# Altium PCB PCB Gate Logic.PcbDoc
Units mm, origin at the board's own origin, x right, y up, seen from the top; angles counter-clockwise.
Board outline 200 x 150 mm, 2 copper layers (Top Layer, Bottom Layer); 95 components, 86 nets, 188 pads, 0 vias.
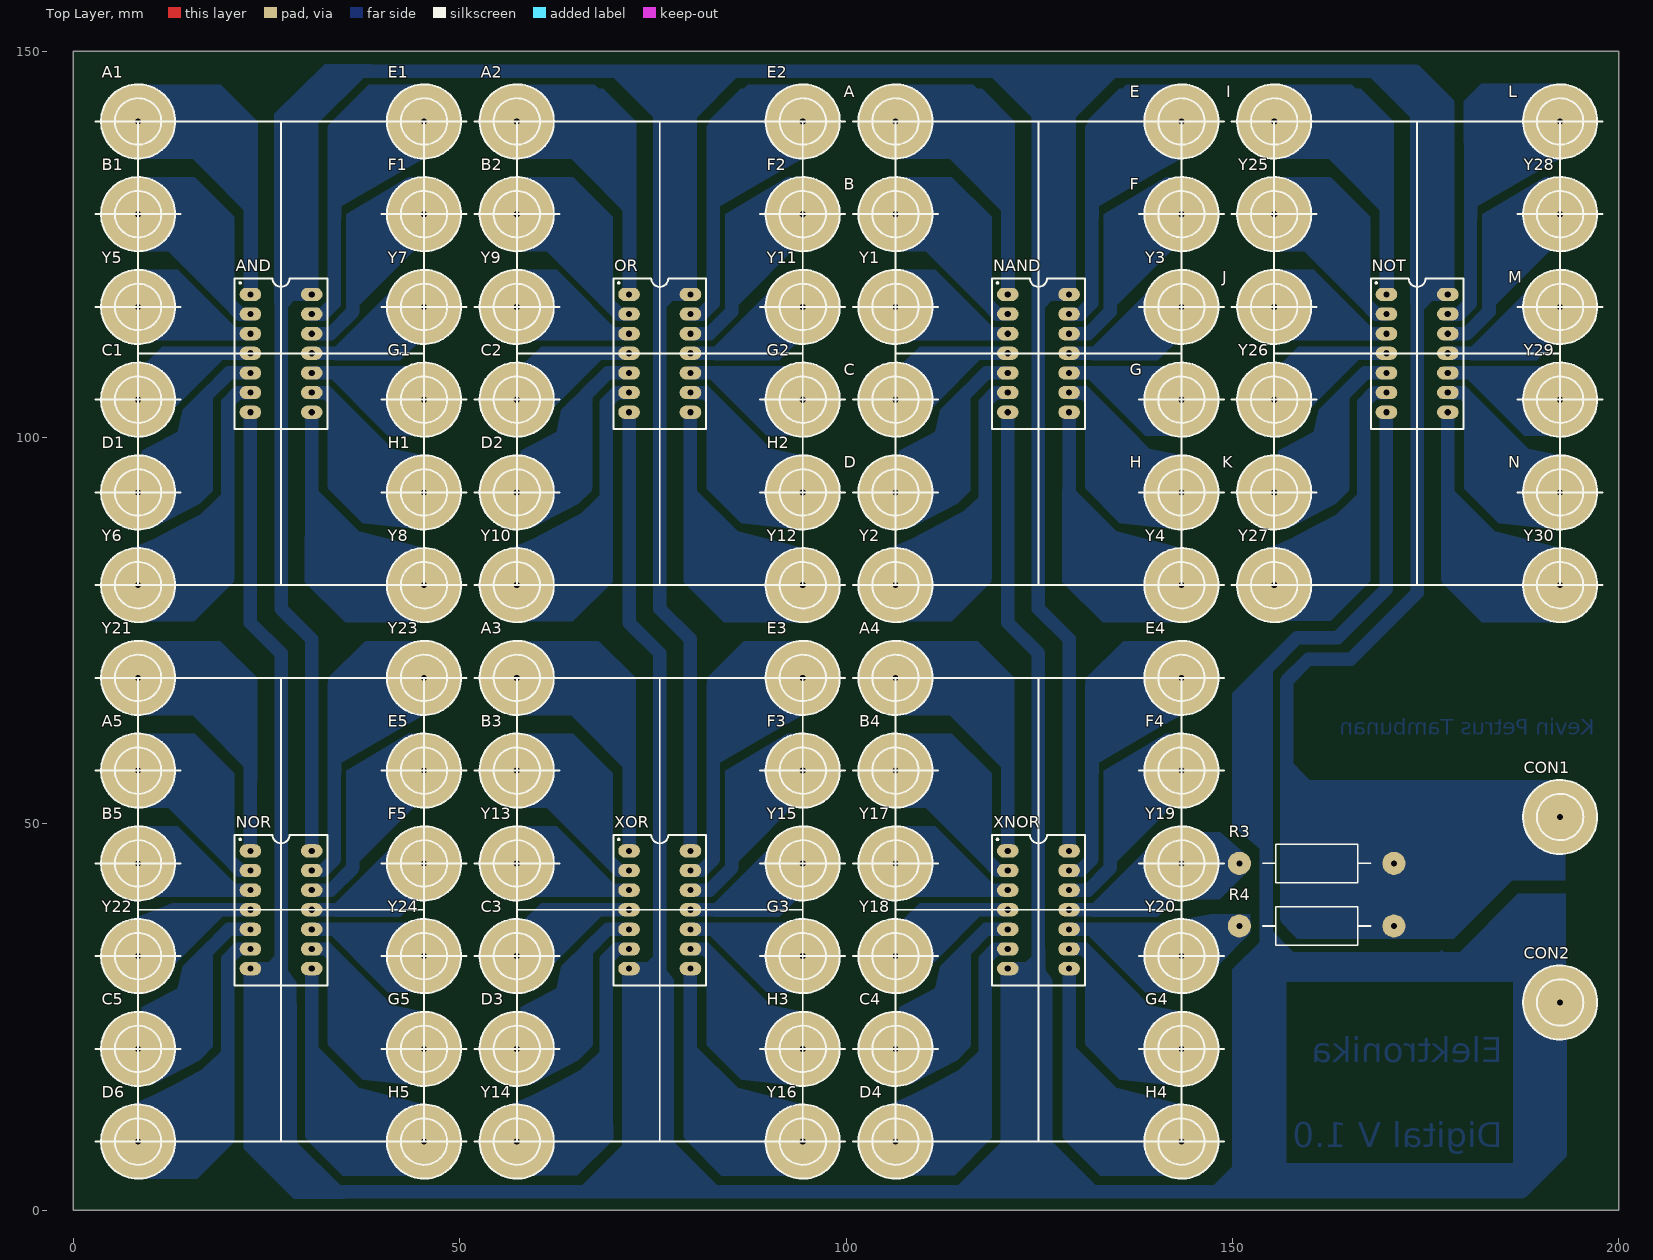
[diagram p0: Top Layer view]
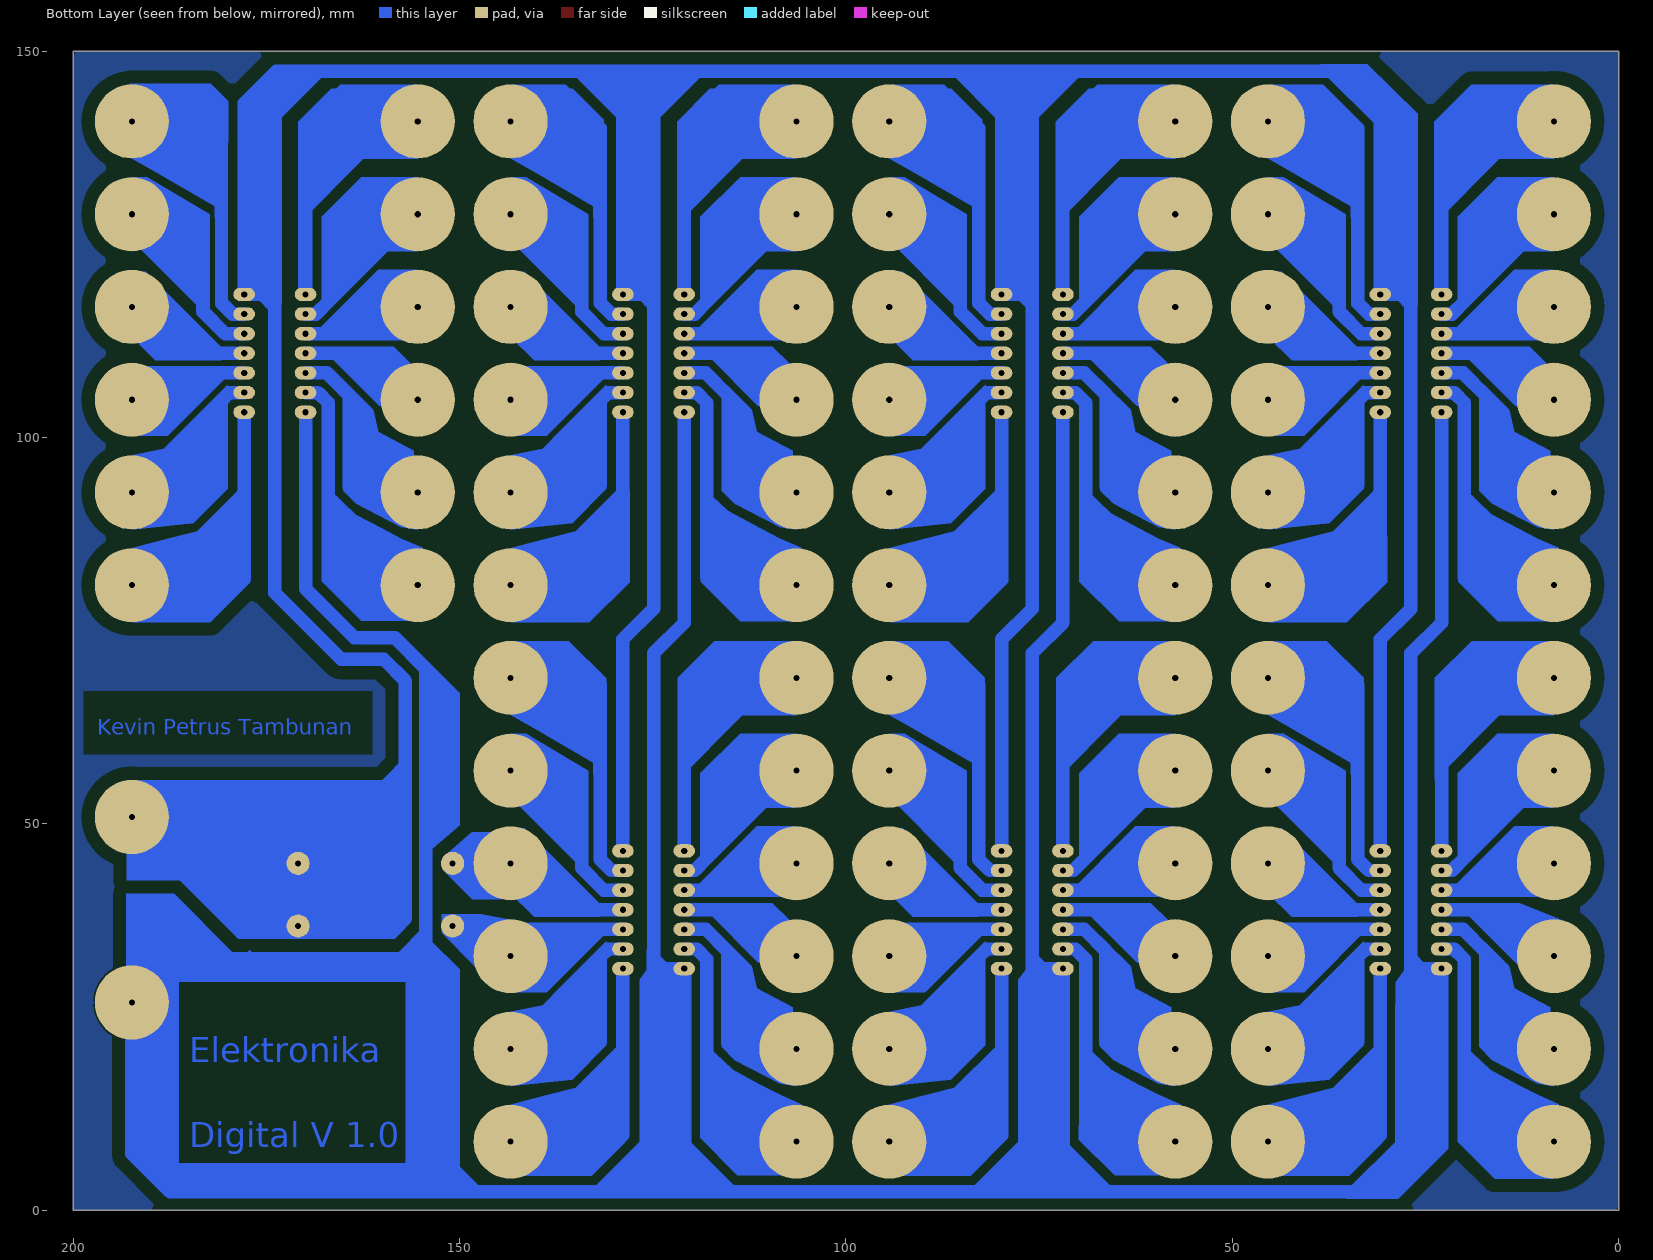
[diagram p1: Bottom Layer view, seen from below]
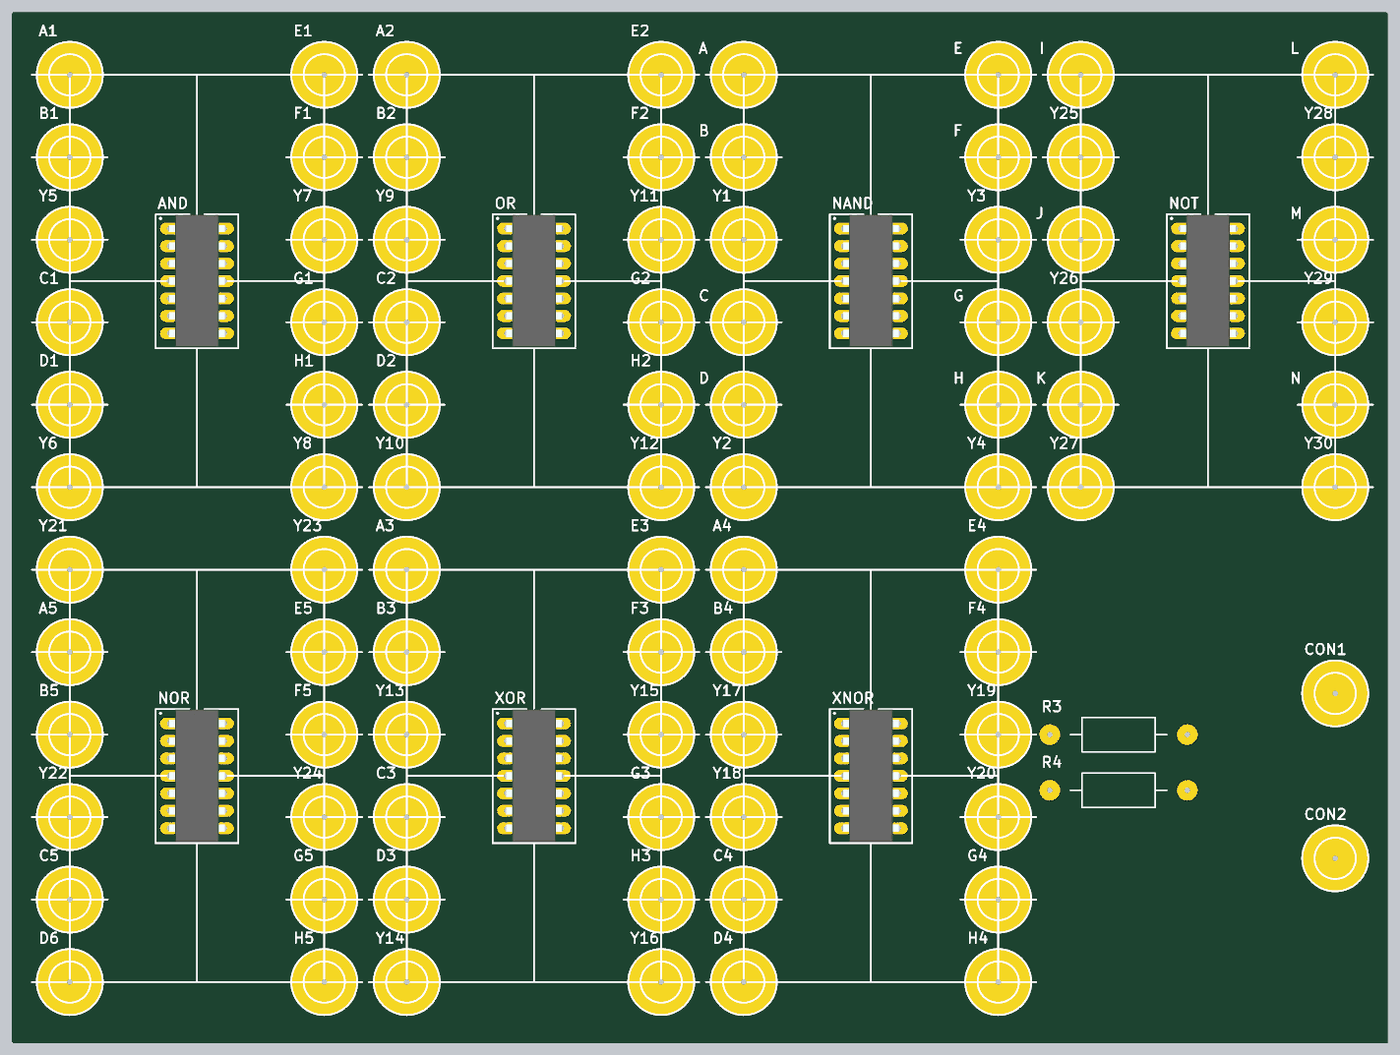
[diagram p2: 3D render of the assembled board from above, using the file's embedded part models]

## Layer stack, top to bottom
Top Solder: solder mask 0.0102, Solder Resist, Dk 3.5
Top Layer: signal copper 0.0356
Dielectric 1: dielectric 0.32, FR-4, Dk 4.8
Bottom Layer: signal copper 0.0356
Bottom Solder: solder mask 0.0102, Solder Resist, Dk 3.5

## Board outline
0,0 200,0 200,150 0,150

## Design rules (kind name [scope] priority, off if disabled: settings)
Clearance [All] p1: gap=1.75 ignorepadtopadclearanceinfootprint=FALSE
PolygonConnect [All] p1: connectstyle=Relief reliefconductorwidth=0.254 reliefentries=4 polygonreliefangle="90 Angle" airgapwidth=0.254
RoutingVias [All] p1: holewidth=0.711 width=1.27 viastyle="Through Hole" minholewidth=0.711 minwidth=1.27 maxholewidth=0.711 maxwidth=1.27
SolderMaskExpansion [All] p1: expansion=0.102
Width [All] p1: maxlimit=0.254 minlimit=0.254 preferedwidth=0.254
30 further rules are at their usual default settings.

## Components (designator, comment, footprint, x,y, rotation, side; value= is the part's Value field where it differs from the comment)
A "Female_Connector_Banana" F_BANANA 106.4,140.9 r90 top locked
A1 "Female_Connector_Banana" F_BANANA 8.4,140.9 r0 top locked
A2 "Female_Connector_Banana" F_BANANA 57.4,140.9 r0 top locked
A3 "Female_Connector_Banana" F_BANANA 57.4,68.9 r0 top locked
A4 "Female_Connector_Banana" F_BANANA 106.4,68.9 r0 top locked
A5 "Female_Connector_Banana" F_BANANA 8.4,56.9 r0 top locked
AND "SN74LS08N" DIP794W53P254L1930H508Q14N 26.9,110.9 r0 top locked
B "Female_Connector_Banana" F_BANANA 106.4,128.9 r90 top locked
B1 "Female_Connector_Banana" F_BANANA 8.4,128.9 r0 top locked
B2 "Female_Connector_Banana" F_BANANA 57.4,128.9 r0 top locked
B3 "Female_Connector_Banana" F_BANANA 57.4,56.9 r0 top locked
B4 "Female_Connector_Banana" F_BANANA 106.4,56.9 r0 top locked
B5 "Female_Connector_Banana" F_BANANA 8.4,44.9 r0 top locked
C "Female_Connector_Banana" F_BANANA 106.4,104.9 r90 top locked
C1 "Female_Connector_Banana" F_BANANA 8.4,104.9 r0 top locked
C2 "Female_Connector_Banana" F_BANANA 57.4,104.9 r0 top locked
C3 "Female_Connector_Banana" F_BANANA 57.4,32.9 r0 top locked
C4 "Female_Connector_Banana" F_BANANA 106.4,20.9 r0 top locked
C5 "Female_Connector_Banana" F_BANANA 8.4,20.9 r0 top locked
CON1 "Female_Connector_Banana" F_BANANA 192.4,50.9 r0 top locked
CON2 "Female_Connector_Banana" F_BANANA 192.4,26.9 r0 top locked
D "Female_Connector_Banana" F_BANANA 106.4,92.9 r90 top locked
D1 "Female_Connector_Banana" F_BANANA 8.4,92.9 r0 top locked
D2 "Female_Connector_Banana" F_BANANA 57.4,92.9 r0 top locked
D3 "Female_Connector_Banana" F_BANANA 57.4,20.9 r0 top locked
D4 "Female_Connector_Banana" F_BANANA 106.4,8.9 r0 top locked
D6 "Female_Connector_Banana" F_BANANA 8.4,8.9 r0 top locked
E "Female_Connector_Banana" F_BANANA 143.4,140.9 r90 top locked
E1 "Female_Connector_Banana" F_BANANA 45.4,140.9 r0 top locked
E2 "Female_Connector_Banana" F_BANANA 94.4,140.9 r0 top locked
E3 "Female_Connector_Banana" F_BANANA 94.4,68.9 r0 top locked
E4 "Female_Connector_Banana" F_BANANA 143.4,68.9 r0 top locked
E5 "Female_Connector_Banana" F_BANANA 45.4,56.9 r0 top locked
F "Female_Connector_Banana" F_BANANA 143.4,128.9 r90 top locked
F1 "Female_Connector_Banana" F_BANANA 45.4,128.9 r0 top locked
F2 "Female_Connector_Banana" F_BANANA 94.4,128.9 r0 top locked
F3 "Female_Connector_Banana" F_BANANA 94.4,56.9 r0 top locked
F4 "Female_Connector_Banana" F_BANANA 143.4,56.9 r0 top locked
F5 "Female_Connector_Banana" F_BANANA 45.4,44.9 r0 top locked
G "Female_Connector_Banana" F_BANANA 143.4,104.9 r90 top locked
G1 "Female_Connector_Banana" F_BANANA 45.4,104.9 r0 top locked
G2 "Female_Connector_Banana" F_BANANA 94.4,104.9 r0 top locked
G3 "Female_Connector_Banana" F_BANANA 94.4,32.9 r0 top locked
G4 "Female_Connector_Banana" F_BANANA 143.4,20.9 r0 top locked
G5 "Female_Connector_Banana" F_BANANA 45.4,20.9 r0 top locked
H "Female_Connector_Banana" F_BANANA 143.4,92.9 r90 top locked
H1 "Female_Connector_Banana" F_BANANA 45.4,92.9 r0 top locked
H2 "Female_Connector_Banana" F_BANANA 94.4,92.9 r0 top locked
H3 "Female_Connector_Banana" F_BANANA 94.4,20.9 r0 top locked
H4 "Female_Connector_Banana" F_BANANA 143.4,8.9 r0 top locked
H5 "Female_Connector_Banana" F_BANANA 45.4,8.9 r0 top locked
I "Female_Connector_Banana" F_BANANA 155.4,140.9 r90 top locked
J "Female_Connector_Banana" F_BANANA 155.4,116.9 r90 top locked
K "Female_Connector_Banana" F_BANANA 155.4,92.9 r90 top locked
L "Female_Connector_Banana" F_BANANA 192.4,140.9 r90 top locked
M "Female_Connector_Banana" F_BANANA 192.4,116.9 r90 top locked
N "Female_Connector_Banana" F_BANANA 192.4,92.9 r90 top locked
NAND "SN74LS00N" DIP794W53P254L1930H508Q14N 124.9,110.9 r0 top locked
NOR "SN74LS02N" DIP794W53P254L1930H508Q14N 26.9,38.9 r0 top locked
NOT "SN74LS04N" DIP794W53P254L1930H508Q14N 173.9,110.9 r0 top locked
OR "SN74LS32N" DIP794W53P254L1930H508Q14N 75.9,110.9 r0 top locked
R3 "Resistor" Resistor 160.9,44.9 r180 top locked
R4 "Resistor" Resistor 160.9,36.8 r180 top locked
XNOR "SN74LS266N" DIP794W53P254L1930H508Q14N 124.9,38.9 r0 top locked
XOR "SN74LS86N" DIP794W53P254L1930H508Q14N 75.9,38.9 r0 top locked
Y1 "Female_Connector_Banana" F_BANANA 106.4,116.9 r0 top locked
Y2 "Female_Connector_Banana" F_BANANA 106.4,80.9 r0 top locked
Y3 "Female_Connector_Banana" F_BANANA 143.4,116.9 r0 top locked
Y4 "Female_Connector_Banana" F_BANANA 143.4,80.9 r0 top locked
Y5 "Female_Connector_Banana" F_BANANA 8.4,116.9 r0 top locked
Y6 "Female_Connector_Banana" F_BANANA 8.4,80.9 r0 top locked
Y7 "Female_Connector_Banana" F_BANANA 45.4,116.9 r0 top locked
Y8 "Female_Connector_Banana" F_BANANA 45.4,80.9 r0 top locked
Y9 "Female_Connector_Banana" F_BANANA 57.4,116.9 r0 top locked
Y10 "Female_Connector_Banana" F_BANANA 57.4,80.9 r0 top locked
Y11 "Female_Connector_Banana" F_BANANA 94.4,116.9 r0 top locked
Y12 "Female_Connector_Banana" F_BANANA 94.4,80.9 r0 top locked
Y13 "Female_Connector_Banana" F_BANANA 57.4,44.9 r0 top locked
Y14 "Female_Connector_Banana" F_BANANA 57.4,8.9 r0 top locked
Y15 "Female_Connector_Banana" F_BANANA 94.4,44.9 r0 top locked
Y16 "Female_Connector_Banana" F_BANANA 94.4,8.9 r0 top locked
Y17 "Female_Connector_Banana" F_BANANA 106.4,44.9 r0 top locked
Y18 "Female_Connector_Banana" F_BANANA 106.4,32.9 r0 top locked
Y19 "Female_Connector_Banana" F_BANANA 143.4,44.9 r0 top locked
Y20 "Female_Connector_Banana" F_BANANA 143.4,32.9 r0 top locked
Y21 "Female_Connector_Banana" F_BANANA 8.4,68.9 r0 top locked
Y22 "Female_Connector_Banana" F_BANANA 8.4,32.9 r0 top locked
Y23 "Female_Connector_Banana" F_BANANA 45.4,68.9 r0 top locked
Y24 "Female_Connector_Banana" F_BANANA 45.4,32.9 r0 top locked
Y25 "Female_Connector_Banana" F_BANANA 155.4,128.9 r0 top locked
Y26 "Female_Connector_Banana" F_BANANA 155.4,104.9 r0 top locked
Y27 "Female_Connector_Banana" F_BANANA 155.4,80.9 r0 top locked
Y28 "Female_Connector_Banana" F_BANANA 192.4,128.9 r0 top locked
Y29 "Female_Connector_Banana" F_BANANA 192.4,104.9 r0 top locked
Y30 "Female_Connector_Banana" F_BANANA 192.4,80.9 r0 top locked

## Footprints (in the part's own frame and the unit in brackets; to place one, negate y for a bottom-side part, rotate by r counter-clockwise, add the part's x,y. Pads: shape width x height; smd on the part's side, far side on the other; paste and mask are expansions set on the pad)
DIP794W53P254L1930H508Q14N [mm]
  oval 2.8x1.72 hole 0.8: 1(-3.97,7.62) 2(-3.97,5.08) 3(-3.97,2.54) 4(-3.97,0) 5(-3.97,-2.54) 6(-3.97,-5.08) 7(-3.97,-7.62) 8(3.97,-7.62) 9(3.97,-5.08) 10(3.97,-2.54) 11(3.97,0) 12(3.97,2.54) 13(3.97,5.08) 14(3.97,7.62)
  silkscreen extent -6,-9.8 6,9.7, body extent -4.1,-9.65 4.1,9.65, height 5.08
F_BANANA [mm]
  round 9.6 hole 0.8: 1(0,0)
  silkscreen extent -4.8,-4.8 4.8,4.8
Resistor [mm]
  round 3 hole 0.8: 1(-10,0) 2(10,0)
  silkscreen extent -7,-2.5 7,2.5

## Part data
AND: "Integrated Circuit", Manufacturer_Name="Texas Instruments", Mouser Part Number=595-SN74LS08N, Arrow Part Number=SN74LS08N, Arrow Price/Stock=https://www.arrow.com/en/products/sn74ls08n/texas-instruments, Datasheet Link=http://componentsearchengine.com/Datasheets/3/SN74LS08N.pdf, Height=5.08mm, Manufacturer_Part_Number=SN74LS08N, Mouser Price/Stock=https://www.mouser.co.uk/ProductDetail/Texas-Instruments/SN74LS08N?qs=spW5eSrOWB4y5MjcKVGhlA%3D%3D
NAND: "Integrated Circuit", Manufacturer_Name="Texas Instruments", Mouser Part Number=595-SN74LS00N, Arrow Part Number=SN74LS00N, Arrow Price/Stock=https://www.arrow.com/en/products/sn74ls00n/texas-instruments, Datasheet Link=http://www.ti.com/lit/gpn/sn74ls00, Height=5.08mm, Manufacturer_Part_Number=SN74LS00N, Mouser Price/Stock=https://www.mouser.co.uk/ProductDetail/Texas-Instruments/SN74LS00N?qs=spW5eSrOWB6G5wECF%252BEZFA%3D%3D
NOR: "Integrated Circuit", Manufacturer_Name="Texas Instruments", Mouser Part Number=595-SN74LS02N, Arrow Part Number=SN74LS02N, Arrow Price/Stock=https://www.arrow.com/en/products/sn74ls02n/texas-instruments, Datasheet Link=http://www.ti.com/lit/gpn/sn74ls02, Height=5.08mm, Manufacturer_Part_Number=SN74LS02N, Mouser Price/Stock=https://www.mouser.co.uk/ProductDetail/Texas-Instruments/SN74LS02N?qs=spW5eSrOWB4KM%252BpAgRke5g%3D%3D
NOT: "Integrated Circuit", Manufacturer_Name="Texas Instruments", Mouser Part Number=595-SN74LS04N, Arrow Part Number=SN74LS04N, Arrow Price/Stock=https://www.arrow.com/en/products/sn74ls04n/texas-instruments, Datasheet Link=http://www.ti.com/lit/gpn/sn74ls04, Height=5.08mm, Manufacturer_Part_Number=SN74LS04N, Mouser Price/Stock=https://www.mouser.co.uk/ProductDetail/Texas-Instruments/SN74LS04N?qs=spW5eSrOWB4DgGWIHPxzvg%3D%3D
OR: "Integrated Circuit", Manufacturer_Name="Texas Instruments", Mouser Part Number=595-SN74LS32N, Arrow Part Number=SN74LS32N, Arrow Price/Stock=https://www.arrow.com/en/products/sn74ls32n/texas-instruments, Datasheet Link=http://componentsearchengine.com/Datasheets/3/SN74LS32N.pdf, Height=5.08mm, Manufacturer_Part_Number=SN74LS32N, Mouser Price/Stock=https://www.mouser.co.uk/ProductDetail/Texas-Instruments/SN74LS32N?qs=q2XTDbzbm6DA9Mnew5GiLA%3D%3D
R3 R4: "Fixed Resistance"
XNOR: "Integrated Circuit", Manufacturer_Name="Texas Instruments", Mouser Part Number=595-SN74LS266N, Arrow Part Number=SN74LS266N, Arrow Price/Stock=https://www.arrow.com/en/products/sn74ls266n/texas-instruments, Datasheet Link=http://www.ti.com/lit/gpn/sn74ls266, Manufacturer_Part_Number=SN74LS266N, Mouser Price/Stock=https://www.mouser.co.uk/ProductDetail/Texas-Instruments/SN74LS266N?qs=JD1fk4stihabbJk2g9oIRA%3D%3D
XOR: "Integrated Circuit", Manufacturer_Name="ON Semiconductor", Datasheet Link=https://docs-emea.rs-online.com/webdocs/0029/0900766b800296c4.pdf, Height=4.69mm, Manufacturer_Part_Number=SN74LS86N

## Nets (pads, with @x,y where several pads share a name; then routed paths per layer and width w, separated by ;. In a path a pad name is that pad's centre, name@x,y a point inside that pad or via, vN(x,y) a via of type N, cw(c..) or ccw(c..) an arc to the next point about the centre after c; other vN are vias at no path point)
+5: AND.14 CON1.1 NAND.14 NOR.14 NOT.14 OR.14 R3.1 R4.1 XNOR.14 XOR.14 | length 644.5
  Bottom Layer w0.254: 79.87,147.37 79.9,147.4 ; 157,51 157.1,50.9
  Bottom Layer w1.74: NOR.14 30.87,73.895 26.9,77.865 26.9,117.182 28.238,118.52 AND.14 30.87,141.035 37.235,147.4 79.9,147.4 128.87,147.4 ; XOR.14 79.87,73.895 75.9,77.865 75.9,117.182 77.238,118.52 OR.14 79.87,147.37 ; XNOR.14 128.87,73.895 124.9,77.865 124.9,117.182 126.238,118.52 NAND.14 128.87,147.4 ; 157.1,50.9 CON1.1 ; R4.1 158,36.8 157,37.8 157,44.9 ; R3.1 157,44.9 ; 128.87,147.4 173.731,147.4 177.87,143.261 NOT.14 175.533,118.52 173.9,116.887 173.9,79.9 165.3,71.3 159.8,71.3 157,68.5 157,51 157,44.9
GND: AND.7 CON2.1 NAND.7 NOR.7 NOT.7 OR.7 XNOR.7 XOR.7 | length 614
  Bottom Layer w0.254: 71.9,2.4 71.93,2.43 ; 120.9,2.4 120.93,2.43
  Bottom Layer w1.74: AND.7 22.93,76.043 26.9,72.073 26.9,32.561 25.619,31.28 NOR.7 22.93,28.47 23.857,27.543 27.057,27.543 28.1,26.5 28.1,8.5 34.2,2.4 71.9,2.4 120.9,2.4 154.4,2.4 ; 71.93,2.43 XOR.7 74.619,31.28 75.9,32.561 75.9,72.073 71.93,76.043 OR.7 ; 120.93,2.43 XNOR.7 123.619,31.28 124.9,32.561 124.9,72.073 120.93,76.043 NAND.7 ; NOT.7 169.93,80.43 163.6,74.1 158.4,74.1 154.4,70.1 154.4,64.1 154.4,2.4 ; CON2.1 192.4,7.34 187.46,2.4 154.4,2.4
NetA1_1: A1.1 AND.1 | length 36.4
  Bottom Layer w1.74: A1.1 22.03,140.9 22.93,140 AND.1
NetA2_1: A2.1 OR.1 | length 36.4
  Bottom Layer w1.74: A2.1 71.03,140.9 71.93,140 OR.1
NetA3_1: A3.1 XOR.1 | length 36.4
  Bottom Layer w1.74: A3.1 71.03,68.9 71.93,68 XOR.1
NetA4_1: A4.1 XNOR.1 | length 36.4
  Bottom Layer w1.74: A4.1 120.03,68.9 120.93,68 XNOR.1
NetA5_1: A5.1 NOR.2 | length 26
  Bottom Layer w1.74: A5.1 19.1,56.9 20,56 20,45.56 21.58,43.98 NOR.2
NetA_1: A.1 NAND.1 | length 36.4
  Bottom Layer w1.74: A.1 120.03,140.9 120.93,140 NAND.1
NetAND_2: AND.2 B1.1 | length 26
  Bottom Layer w1.74: B1.1 19.1,128.9 20,128 20,117.56 21.58,115.98 AND.2
NetAND_3: AND.3 Y5.1 | length 16
  Bottom Layer w1.74: Y5.1 17.1,116.9 20.56,113.44 AND.3
NetAND_4: AND.4 C1.1 | length 17
  Bottom Layer w1.74: C1.1 13,104.9 19,110.9 AND.4
NetAND_5: AND.5 D1.1 | length 27.9
  Bottom Layer w1.74: D1.1 16.6,92.9 17.223,93.523 17.223,105.423 20.16,108.36 AND.5
NetAND_6: AND.6 Y6.1 | length 38.1
  Bottom Layer w1.74: Y6.1 19,80.9 20,81.9 20,104.5 21.32,105.82 AND.6
NetAND_8: AND.8 Y8.1 | length 36.4
  Bottom Layer w1.74: AND.8 30.87,81.73 31.7,80.9 Y8.1
NetAND_9: AND.9 H1.1 | length 26.3
  Bottom Layer w1.74: AND.9 32.78,105.82 33.8,104.8 33.8,93.8 34.7,92.9 H1.1
NetAND_10: AND.10 G1.1 | length 16
  Bottom Layer w1.74: AND.10 33.84,108.36 37.3,104.9 G1.1
NetAND_11: AND.11 Y7.1 | length 17
  Bottom Layer w1.74: AND.11 34.3,110.9 40.3,116.9 Y7.1
NetAND_12: AND.12 F1.1 | length 27.8
  Bottom Layer w1.74: AND.12 33.34,113.44 36.2,116.3 36.2,128 37.1,128.9 F1.1
NetAND_13: AND.13 E1.1 | length 38.1
  Bottom Layer w1.74: AND.13 32.38,115.98 33.8,117.4 33.8,140 34.7,140.9 E1.1
NetB2_1: B2.1 OR.2 | length 26
  Bottom Layer w1.74: B2.1 68.1,128.9 69,128 69,117.56 70.58,115.98 OR.2
NetB3_1: B3.1 XOR.2 | length 26
  Bottom Layer w1.74: B3.1 68.1,56.9 69,56 69,45.56 70.58,43.98 XOR.2
NetB4_1: B4.1 XNOR.2 | length 26
  Bottom Layer w1.74: B4.1 117.1,56.9 118,56 118,45.56 119.58,43.98 XNOR.2
NetB5_1: B5.1 NOR.3 | length 16
  Bottom Layer w1.74: B5.1 17.1,44.9 20.56,41.44 NOR.3
NetB_1: B.1 NAND.2 | length 26
  Bottom Layer w1.74: B.1 117.1,128.9 118,128 118,117.56 119.58,115.98 NAND.2
NetC2_1: C2.1 OR.4 | length 17
  Bottom Layer w1.74: C2.1 62,104.9 68,110.9 OR.4
NetC3_1: C3.1 XOR.4 | length 17
  Bottom Layer w1.74: C3.1 62,32.9 68,38.9 XOR.4
NetC4_1: C4.1 XNOR.5 | length 27.9
  Bottom Layer w1.74: C4.1 114.6,20.9 115.3,21.6 115.3,33.5 118.16,36.36 XNOR.5
NetC5_1: C5.1 NOR.5 | length 27.9
  Bottom Layer w1.74: C5.1 16.6,20.9 17.223,21.523 17.223,33.423 20.16,36.36 NOR.5
NetC_1: C.1 NAND.4 | length 17
  Bottom Layer w1.74: C.1 111,104.9 117,110.9 NAND.4
NetD2_1: D2.1 OR.5 | length 27.9
  Bottom Layer w1.74: D2.1 65.6,92.9 66.3,93.6 66.3,105.5 69.16,108.36 OR.5
NetD3_1: D3.1 XOR.5 | length 27.9
  Bottom Layer w1.74: D3.1 65.6,20.9 66.365,21.665 66.365,33.565 69.16,36.36 XOR.5
NetD4_1: D4.1 XNOR.6 | length 38.1
  Bottom Layer w1.74: D4.1 117,8.9 118,9.9 118,32.5 119.32,33.82 XNOR.6
NetD6_1: D6.1 NOR.6 | length 38.1
  Bottom Layer w1.74: D6.1 19,8.9 20,9.9 20,32.5 21.32,33.82 NOR.6
NetD_1: D.1 NAND.5 | length 27.9
  Bottom Layer w1.74: D.1 114.6,92.9 115.223,93.523 115.223,105.423 118.16,108.36 NAND.5
NetE2_1: E2.1 OR.13 | length 38.1
  Bottom Layer w1.74: OR.13 81.38,115.98 82.8,117.4 82.8,140 83.7,140.9 E2.1
NetE3_1: E3.1 XOR.13 | length 38.1
  Bottom Layer w1.74: XOR.13 81.38,43.98 82.8,45.4 82.8,68 83.7,68.9 E3.1
NetE4_1: E4.1 XNOR.13 | length 38.1
  Bottom Layer w1.74: XNOR.13 130.38,43.98 131.8,45.4 131.8,68 132.7,68.9 E4.1
NetE5_1: E5.1 NOR.12 | length 27.8
  Bottom Layer w1.74: NOR.12 33.34,41.44 36.2,44.3 36.2,56 37.1,56.9 E5.1
NetE_1: E.1 NAND.13 | length 38.1
  Bottom Layer w1.74: NAND.13 130.38,115.98 131.8,117.4 131.8,140 132.7,140.9 E.1
NetF2_1: F2.1 OR.12 | length 27.8
  Bottom Layer w1.74: OR.12 82.34,113.44 85.2,116.3 85.2,128 86.1,128.9 F2.1
NetF3_1: F3.1 XOR.12 | length 27.8
  Bottom Layer w1.74: XOR.12 82.34,41.44 85.2,44.3 85.2,56 86.1,56.9 F3.1
NetF4_1: F4.1 XNOR.12 | length 27.8
  Bottom Layer w1.74: XNOR.12 131.34,41.44 134.2,44.3 134.2,56 135.1,56.9 F4.1
NetF5_1: F5.1 NOR.11 | length 17
  Bottom Layer w1.74: NOR.11 34.3,38.9 40.3,44.9 F5.1
NetF_1: F.1 NAND.12 | length 27.8
  Bottom Layer w1.74: NAND.12 131.34,113.44 134.2,116.3 134.2,128 135.1,128.9 F.1
NetG2_1: G2.1 OR.10 | length 16
  Bottom Layer w1.74: OR.10 82.84,108.36 86.3,104.9 G2.1
NetG3_1: G3.1 XOR.10 | length 16
  Bottom Layer w1.74: XOR.10 82.84,36.36 86.3,32.9 G3.1
NetG4_1: G4.1 XNOR.9 | length 26.3
  Bottom Layer w1.74: XNOR.9 130.78,33.82 131.8,32.8 131.8,21.8 132.7,20.9 G4.1
NetG5_1: G5.1 NOR.9 | length 26.3
  Bottom Layer w1.74: NOR.9 32.78,33.82 33.8,32.8 33.8,21.8 34.7,20.9 G5.1
NetG_1: G.1 NAND.10 | length 16
  Bottom Layer w1.74: NAND.10 131.84,108.36 135.3,104.9 G.1
NetH2_1: H2.1 OR.9 | length 26.3
  Bottom Layer w1.74: OR.9 81.78,105.82 82.8,104.8 82.8,93.8 83.7,92.9 H2.1
NetH3_1: H3.1 XOR.9 | length 26.3
  Bottom Layer w1.74: XOR.9 81.78,33.82 82.8,32.8 82.8,21.8 83.7,20.9 H3.1
NetH4_1: H4.1 XNOR.8 | length 36.4
  Bottom Layer w1.74: XNOR.8 128.87,9.73 129.7,8.9 H4.1
NetH5_1: H5.1 NOR.8 | length 36.4
  Bottom Layer w1.74: NOR.8 30.87,9.73 31.7,8.9 H5.1
NetH_1: H.1 NAND.9 | length 26.3
  Bottom Layer w1.74: NAND.9 130.78,105.82 131.8,104.8 131.8,93.8 132.7,92.9 H.1
NetI_1: I.1 NOT.1 | length 36.4
  Bottom Layer w1.74: I.1 169.03,140.9 169.93,140 NOT.1
NetJ_1: J.1 NOT.3 | length 16
  Bottom Layer w1.74: J.1 164.1,116.9 167.56,113.44 NOT.3
NetK_1: K.1 NOT.5 | length 27.9
  Bottom Layer w1.74: K.1 163.6,92.9 164.3,93.6 164.3,105.5 167.16,108.36 NOT.5
NetL_1: L.1 NOT.13 | length 38.1
  Bottom Layer w1.74: NOT.13 179.38,115.98 180.8,117.4 180.8,140 181.7,140.9 L.1
NetM_1: M.1 NOT.11 | length 17
  Bottom Layer w1.74: NOT.11 181.3,110.9 187.3,116.9 M.1
NetN_1: N.1 NOT.9 | length 26.3
  Bottom Layer w1.74: NOT.9 179.78,105.82 180.8,104.8 180.8,93.8 181.7,92.9 N.1
NetNAND_3: NAND.3 Y1.1 | length 16
  Bottom Layer w1.74: Y1.1 115.1,116.9 118.56,113.44 NAND.3
NetNAND_6: NAND.6 Y2.1 | length 38.1
  Bottom Layer w1.74: Y2.1 117,80.9 118,81.9 118,104.5 119.32,105.82 NAND.6
NetNAND_8: NAND.8 Y4.1 | length 36.4
  Bottom Layer w1.74: NAND.8 128.87,81.73 129.7,80.9 Y4.1
NetNAND_11: NAND.11 Y3.1 | length 17
  Bottom Layer w1.74: NAND.11 132.3,110.9 138.3,116.9 Y3.1
NetNOR_1: NOR.1 Y21.1 | length 36.4
  Bottom Layer w1.74: Y21.1 22.03,68.9 22.93,68 NOR.1
NetNOR_4: NOR.4 Y22.1 | length 17
  Bottom Layer w1.74: Y22.1 13,32.9 19,38.9 NOR.4
NetNOR_10: NOR.10 Y24.1 | length 16
  Bottom Layer w1.74: NOR.10 33.84,36.36 37.3,32.9 Y24.1
NetNOR_13: NOR.13 Y23.1 | length 38.1
  Bottom Layer w1.74: NOR.13 32.38,43.98 33.8,45.4 33.8,68 34.7,68.9 Y23.1
NetNOT_2: NOT.2 Y25.1 | length 26
  Bottom Layer w1.74: Y25.1 166.1,128.9 167,128 167,117.56 168.58,115.98 NOT.2
NetNOT_4: NOT.4 Y26.1 | length 17
  Bottom Layer w1.74: Y26.1 160,104.9 166,110.9 NOT.4
NetNOT_6: NOT.6 Y27.1 | length 38.1
  Bottom Layer w1.74: Y27.1 166,80.9 167,81.9 167,104.5 168.32,105.82 NOT.6
NetNOT_8: NOT.8 Y30.1 | length 36.4
  Bottom Layer w1.74: NOT.8 177.87,81.73 178.7,80.9 Y30.1
NetNOT_10: NOT.10 Y29.1 | length 16
  Bottom Layer w1.74: NOT.10 180.84,108.36 184.3,104.9 Y29.1
NetNOT_12: NOT.12 Y28.1 | length 27.8
  Bottom Layer w1.74: NOT.12 180.34,113.44 183.2,116.3 183.2,128 184.1,128.9 Y28.1
NetOR_3: OR.3 Y9.1 | length 16
  Bottom Layer w1.74: Y9.1 66.1,116.9 69.56,113.44 OR.3
NetOR_6: OR.6 Y10.1 | length 38.1
  Bottom Layer w1.74: Y10.1 68,80.9 69,81.9 69,104.5 70.32,105.82 OR.6
NetOR_8: OR.8 Y12.1 | length 36.4
  Bottom Layer w1.74: OR.8 79.87,81.73 80.7,80.9 Y12.1
NetOR_11: OR.11 Y11.1 | length 17
  Bottom Layer w1.74: OR.11 83.3,110.9 89.3,116.9 Y11.1
NetXOR_3: XOR.3 Y13.1 | length 16
  Bottom Layer w1.74: Y13.1 66.1,44.9 69.56,41.44 XOR.3
NetXOR_6: XOR.6 Y14.1 | length 38.1
  Bottom Layer w1.74: Y14.1 68,8.9 69,9.9 69,32.5 70.32,33.82 XOR.6
NetXOR_8: XOR.8 Y16.1 | length 36.4
  Bottom Layer w1.74: XOR.8 79.87,9.73 80.7,8.9 Y16.1
NetXOR_11: XOR.11 Y15.1 | length 17
  Bottom Layer w1.74: XOR.11 83.3,38.9 89.3,44.9 Y15.1
Y1_XNOR: XNOR.3 Y17.1 | length 16
  Bottom Layer w1.74: Y17.1 115.1,44.9 118.56,41.44 XNOR.3
Y2_XNOR: XNOR.4 Y18.1 | length 17
  Bottom Layer w1.74: Y18.1 111,32.9 117,38.9 XNOR.4
Y3_XNOR: R3.2 XNOR.11 Y19.1 | length 24.5
  Bottom Layer w1.74: XNOR.11 132.3,38.9 138.3,44.9 Y19.1
  Bottom Layer w3: Y19.1 R3.2
Y4_XNOR: R4.2 XNOR.10 Y20.1 | length 25.1
  Bottom Layer w1.74: XNOR.10 131.84,36.36 135.3,32.9 Y20.1 Y20.1@143.63,32.9
  Bottom Layer w3: Y20.1@143.63,32.9 147.53,36.8 R4.2

## Polygon pours and split planes (outlines as drawn)
GND on Bottom Layer "Bottom Layer-GND" (solid, pour order 0): 200.002,150 0,150 -0.007,0 199.996,0

## Other copper
Bottom Layer:
  region net GND: 186.35,5.937 186.35,35.25 190.6,39.5 192.437,39.5 192.437,9.404 191.9,8.855 191.9,5.889
  region net GND: 192.05,6.1 156.579,6.1 154.8,4.321 154.8,1.6 187.55,1.6
  region net GND: 149.977,29 149.977,5.667 146.71,2.4 154.4,2.4 157.021,5.021 156.969,5.073 156.969,29
  region net GND: 149.8,29
  region net GND: 193.098,40.948 186.919,40.948 179.388,33.417 157.883,33.417 154.8,36.5 153.9,36.5 153.9,35.1 149.977,31.177 149.977,25.1 156.969,25.1 156.969,29.6 193.103,29.6
  region net NetH_1: 130.989,106.841 134.697,103.133 136.755,101.075 139.268,98.562 143.428,97.689 143.428,88.077 135.444,88.907 130.989,93.362
  region net NetNAND_8: 129.568,93.24 134.96,87.848 138.276,87.011 141.311,86.245 143.469,85.683 143.367,76.1 133.2,76.1 127.997,81.303 128.004,93.237
  region net NetNAND_6: 118.317,93.348 115.323,90.521 111.094,88.284 108.521,86.934 105.773,85.712 107.012,76.2 113.671,76.2 118.8,81.329 118.8,93.348
  region net NetE_1: 132.67,128.421 132.67,129.899 140.362,134.377 143.452,136.106 143.452,145.363 143.158,145.657 136.265,145.657 131.025,140.417 131.025,128.421
  region net NetA_1: 121.792,127.679 113.449,136.087 106.411,136.087 106.411,145.669 116.458,145.673 121.792,140.339
  region net NetB_1: 118.841,115.545 117.038,117.348 110.299,124.087 106.419,124.087 106.419,133.688 113.7,133.69 118.841,128.549
  region net NetD_1: 115.365,106.761 112.178,103.575 111.548,100.751 106.903,98.289 106.43,88.082 108.519,88.37 114.373,91.443 116.073,93.144
  region net NetNAND_3: 120.64,112.59 106.397,112.59 106.393,121.683 111.547,121.683
  region net NetF_1: 133.347,115.438 144.963,127.054 143.468,133.684 141.38,133.684 133.347,128.865
  region net NetG_1: 129.757,109.213 143.4,109.213 143.404,100.235 142.042,100.235 138.735,100.235
  region net NetNAND_11: 131.866,110.013 140.343,110.013 143.427,113.01 143.251,121.427 141.631,121.427 131.866,111.662
  region net NetH2_1: 81.989,106.841 85.697,103.133 87.755,101.075 90.268,98.562 94.428,97.689 94.428,88.077 86.444,88.907 81.989,93.362
  region net NetOR_8: 80.568,93.24 85.96,87.848 89.276,87.011 92.311,86.245 94.469,85.683 94.367,76.1 84.2,76.1 78.997,81.303 79.004,93.237
  region net NetOR_6: 69.069,93.348 65.759,90.223 62.094,88.284 59.521,86.934 56.773,85.712 58.012,76.2 64.671,76.2 69.8,81.329 69.8,93.348
  region net NetE2_1: 83.67,128.421 83.67,129.899 91.362,134.377 94.452,136.106 94.452,145.363 94.158,145.657 87.265,145.657 82.025,140.417 82.025,128.421
  region net NetA2_1: 72.792,127.679 64.449,136.087 57.411,136.087 57.411,145.669 67.458,145.673 72.792,140.339
  region net NetB2_1: 69.841,115.545 68.038,117.348 61.299,124.087 57.419,124.087 57.419,133.688 64.7,133.69 69.841,128.549
  region net NetD2_1: 66.365,106.761 63.178,103.575 62.548,100.751 57.903,98.289 57.43,88.082 59.519,88.37 65.373,91.443 67.073,93.144
  region net NetOR_3: 71.64,112.59 57.397,112.59 57.393,121.683 62.547,121.683
  region net NetF2_1: 84.347,115.438 95.963,127.054 94.468,133.684 92.38,133.684 84.347,128.865
  region net NetG2_1: 80.757,109.213 94.4,109.213 94.404,100.235 93.042,100.235 89.735,100.235
  region net NetOR_11: 82.866,110.013 91.343,110.013 94.427,113.01 94.251,121.427 92.631,121.427 82.866,111.662
  region net NetAND_9: 32.989,106.841 36.697,103.133 38.755,101.075 41.268,98.562 45.428,97.689 45.428,88.077 37.444,88.907 32.989,93.362
  region net NetAND_8: 31.568,93.24 36.96,87.848 40.276,87.011 43.311,86.245 45.469,85.683 45.367,76.1 35.2,76.1 29.997,81.303 30.004,93.237
  region net NetAND_6: 19.963,93.348 16.518,90.095 13.094,88.284 10.521,86.934 7.773,85.712 9.012,76.2 15.671,76.2 20.8,81.329 20.8,93.348
  region net NetAND_13: 34.67,128.421 34.67,129.899 42.362,134.377 45.452,136.106 45.452,145.363 45.158,145.657 38.265,145.657 33.025,140.417 33.025,128.421
  region net NetA1_1: 23.792,127.679 15.449,136.087 8.411,136.087 8.411,145.669 18.458,145.673 23.792,140.339
  region net NetAND_2: 20.841,115.545 19.038,117.348 12.299,124.087 8.419,124.087 8.419,133.688 15.7,133.69 20.841,128.549
  region net NetAND_5: 17.365,106.761 14.178,103.575 13.548,100.751 8.903,98.289 8.43,88.082 10.519,88.37 16.373,91.443 18.073,93.144
  region net NetAND_3: 22.64,112.59 8.397,112.59 8.393,121.683 13.547,121.683
  region net NetAND_12: 35.347,115.438 46.963,127.054 45.468,133.684 43.38,133.684 35.347,128.865
  region net NetAND_10: 31.757,109.213 45.4,109.213 45.404,100.235 44.042,100.235 40.735,100.235
  region net NetAND_11: 33.866,110.013 42.343,110.013 45.427,113.01 45.251,121.427 43.631,121.427 33.866,111.662
  region net Y3_XNOR: 131.866,38.013 140.343,38.013 143.427,41.01 143.251,49.427 141.631,49.427 131.866,39.662
  region net Y4_XNOR: 129.757,37.213 143.4,37.213 143.404,28.235 142.042,28.235 138.735,28.235
  region net NetF4_1: 133.347,43.438 144.963,55.054 143.468,61.684 141.38,61.684 133.347,56.865
  region net Y1_XNOR: 120.64,40.59 106.397,40.59 106.393,49.683 111.547,49.683
  region net NetC4_1: 115.365,34.761 112.178,31.575 111.548,28.751 106.903,26.289 106.43,16.082 108.519,16.37 114.373,19.443 116.073,21.144
  region net NetB4_1: 118.841,43.545 117.038,45.348 110.299,52.087 106.419,52.087 106.419,61.688 113.7,61.69 118.841,56.549
  region net NetA4_1: 121.792,55.679 113.449,64.087 106.411,64.087 106.411,73.669 117.026,73.674 121.792,68.908
  region net NetE4_1: 132.67,56.421 132.67,57.899 140.362,62.377 143.452,64.106 143.452,73.363 143.158,73.657 135.857,73.657 131.025,68.825 131.025,56.421
  region net NetD4_1: 118.023,21.348 114.655,18.168 111.094,16.284 108.521,14.934 105.773,13.712 106.4,8.9 106.417,8.883 117.017,8.883 118.023,9.889
  region net NetH4_1: 129.568,21.24 134.96,15.848 138.276,15.011 141.311,14.245 143.469,13.683 143.418,8.884 129.717,8.883 128.887,9.713 128.894,21.239
  region net NetG4_1: 130.989,34.841 134.697,31.133 136.755,29.075 139.268,26.562 143.428,25.689 143.428,16.077 135.444,16.907 130.989,21.362
  region net NetXOR_11: 82.866,38.013 91.343,38.013 94.427,41.01 94.251,49.427 92.631,49.427 82.866,39.662
  region net NetG3_1: 80.757,37.213 94.4,37.213 94.404,28.235 93.042,28.235 89.735,28.235
  region net NetF3_1: 84.347,43.438 95.963,55.054 94.468,61.684 92.38,61.684 84.347,56.865
  region net NetXOR_3: 71.64,40.59 57.397,40.59 57.393,49.683 62.547,49.683
  region net NetD3_1: 66.365,34.761 63.178,31.575 62.548,28.751 57.903,26.289 57.43,16.082 59.519,16.37 65.373,19.443 67.073,21.144
  region net NetB3_1: 69.841,43.545 68.038,45.348 61.299,52.087 57.419,52.087 57.419,61.688 64.7,61.69 69.841,56.549
  region net NetA3_1: 72.792,55.679 64.449,64.087 57.411,64.087 57.411,73.669 68.026,73.674 72.792,68.908
  region net NetE3_1: 83.67,56.421 83.67,57.899 91.362,62.377 94.452,64.106 94.452,73.363 94.158,73.657 86.766,73.657 82.025,68.916 82.025,56.421
  region net NetXOR_6: 69.023,21.348 65.655,18.168 62.094,16.284 59.521,14.934 56.773,13.712 57.4,8.9 57.417,8.883 68.017,8.883 69.023,9.889
  region net NetXOR_8: 80.568,21.24 85.96,15.848 89.276,15.011 92.311,14.245 94.469,13.683 94.418,8.884 80.717,8.883 79.887,9.713 79.894,21.239
  region net NetH3_1: 81.989,34.841 85.697,31.133 87.755,29.075 90.268,26.562 94.428,25.689 94.428,16.077 86.444,16.907 81.989,21.362
  region net NetM_1: 180.866,110.013 189.343,110.013 192.427,113.01 192.251,121.427 190.631,121.427 180.866,111.662
  region net NetNOT_10: 178.757,109.213 192.4,109.213 192.404,100.235 191.042,100.235 187.735,100.235
  region net NetNOT_12: 182.347,115.438 193.963,127.054 192.468,133.684 190.38,133.684 182.347,128.865
  region net NetJ_1: 169.64,112.59 155.397,112.59 155.393,121.683 160.547,121.683
  region net NetK_1: 164.365,106.761 161.178,103.575 160.548,100.751 155.903,98.289 155.43,88.082 157.519,88.37 163.373,91.443 165.073,93.144
  region net NetNOT_2: 167.841,115.545 166.038,117.348 159.299,124.087 155.419,124.087 155.419,133.688 162.7,133.69 167.841,128.549
  region net NetI_1: 170.792,127.679 162.449,136.087 155.411,136.087 155.411,145.669 165.458,145.673 170.792,140.339
  region net NetL_1: 181.67,128.421 181.67,129.899 189.362,134.377 195.01,137.538 195.01,143.32 192.579,145.751 185.359,145.751 180.025,140.417 180.025,128.421
  region net NetNOT_6: 166.917,93.348 163.414,90.04 160.094,88.284 157.521,86.934 154.773,85.712 155.879,77.221 156.8,76.3 162.7,76.3 167.8,81.4 167.8,93.348
  region net NetNOT_8: 178.568,93.24 183.96,87.848 187.276,87.011 190.311,86.245 192.469,85.683 192.367,76.1 182.25,76.1 177.096,81.254 177.104,93.238
  region net NetN_1: 179.989,106.841 183.697,103.133 185.755,101.075 188.268,98.562 192.428,97.689 192.428,88.077 184.444,88.907 179.989,93.362
  region net NetF5_1: 33.866,38.013 42.343,38.013 45.427,41.01 45.251,49.427 43.631,49.427 33.866,39.662
  region net NetNOR_10: 31.757,37.213 45.4,37.213 45.404,28.235 44.042,28.235 40.735,28.235
  region net NetE5_1: 35.347,43.438 46.963,55.054 45.468,61.684 43.38,61.684 35.347,56.865
  region net NetB5_1: 22.64,40.59 8.397,40.59 8.393,49.683 13.547,49.683
  region net NetC5_1: 17.365,34.761 14.178,31.575 13.548,28.751 8.903,26.289 8.43,16.082 10.519,16.37 16.373,19.443 18.073,21.144
  region net NetA5_1: 20.841,43.545 19.038,45.348 12.299,52.087 8.419,52.087 8.419,61.688 15.7,61.69 20.841,56.549
  region net NetNOR_1: 23.792,55.679 15.449,64.087 8.411,64.087 8.411,73.669 19.026,73.674 23.792,68.908
  region net NetNOR_13: 34.67,56.421 34.67,57.899 42.362,62.377 45.452,64.106 45.452,73.363 45.158,73.657 37.766,73.657 33.025,68.916 33.025,56.421
  region net NetD6_1: 20.023,21.348 16.655,18.168 13.094,16.284 10.521,14.934 7.773,13.712 8.4,8.9 8.417,8.883 19.017,8.883 20.023,9.889
  region net NetH5_1: 31.568,21.24 36.96,15.848 40.276,15.011 43.311,14.245 45.469,13.683 45.418,8.884 31.717,8.883 30.887,9.713 30.894,21.239
  region net NetG5_1: 32.989,34.841 36.697,31.133 38.755,29.075 41.268,26.562 45.428,25.689 45.428,16.077 37.444,16.907 32.989,21.362
  region net NetA2_1: 72.853,119.288 72.853,140.863 68.608,145.108 59.863,145.108 59.863,138.305 65.782,138.305 71.958,132.129 71.958,119.296
  region net NetNOT_4: 166.571,111.77 166.568,111.767 158.541,111.767 156.366,109.592 156.366,104.54 159.182,104.54 166.412,111.77
  region net Y2_XNOR: 117.571,39.77 117.568,39.767 109.541,39.767 107.366,37.592 107.366,32.54 110.182,32.54 117.412,39.77
  region net NetI_1: 170.853,119.288 170.853,140.863 166.608,145.108 157.863,145.108 157.863,138.305 164.666,138.305 169.958,132.129 169.958,119.296
  region net +5: 192.437,50.863 192.441,55.683 160.017,55.683 156.969,58.731 156.969,50.808
  region net Y4_XNOR: 152.3,35.9 147.945,31.545 144.259,31.545 143.4,37.6 147.132,38.302 152.3,38.302
  region net Y3_XNOR: 151.539,46.221 148.427,48.896 145.988,48.896 145.988,41.656 144.601,40.269 148.346,40.262 151.648,43.564
  region net NetD4_1: 118.869,11.035 118.869,9.369 114.053,4.553 106.141,4.553 112.61,11.022
  region net GND: 120.029,30.503 120.029,8.729 114.478,3.178 114.478,2.456 133.094,2.456 126.682,8.878 126.682,29.855 125.767,31.143 125.767,33.81 124.812,33.81 124.399,33.397 124.399,32.089 120.567,32.089 120.04,31.562
  region net GND: 71.029,30.503 71.029,8.447 65.478,2.896 65.478,2.456 84.094,2.456 77.682,8.878 77.682,29.855 76.767,31.143 76.767,33.81 75.812,33.81 75.399,33.397 75.399,32.089 71.567,32.089 71.04,31.562
  region net NetXOR_6: 69.869,11.035 69.869,9.169 65.253,4.553 57.141,4.553 63.61,11.022
  region net NetD6_1: 20.869,11.035 20.869,8.886 16.07,4.087 8.433,4.087 8.433,4.845 14.61,11.022
  region net GND: 22.06,30.486 22.06,8.008 28.537,1.531 35.234,1.531 35.234,1.761 28.22,8.775 28.896,9.451 28.896,29.513 27.769,31.041 27.769,32.758 26.501,32.758 24.223,30.48
  region net NetH4_1: 128.557,8.813 132.876,4.494 141.778,4.494 141.778,8.802 141.767,8.813
  region net NetXOR_8: 79.557,8.813 83.876,4.494 92.778,4.494 92.778,8.802 92.767,8.813
  region net NetL_1: 179.952,143.51 182.186,145.751 192.677,145.751 192.677,141.693 189.126,138.142 179.952,138.142
  region net NetA1_1: 23.853,119.288 23.853,140.853 19.073,145.633 9.283,145.633 9.283,139.885 17.177,139.885 22.958,132.129 22.958,119.296
  region net +5: 26.031,117.159 26.031,141.907 32.555,148.269 38.562,148.269 30.834,140.541 30.834,119.299 30.289,119.299 29.059,118.069 26.793,118.069 26.793,117.903 26.043,117.153
  region net GND: 159.308,74.815 157.899,74.815 149.977,66.893 149.977,49.816 153.511,46.813 155.041,46.813 155.041,70.685 158.679,74.323
  region net GND: 158.501,73.949 158.496,73.954 154.652,73.954
  region net +5: 173.031,117.159 173.031,141.421 167.022,147.43 173.596,147.498 177.834,143.261 177.834,119.299 177.289,119.299 176.059,118.069 173.793,118.069 173.793,117.903 173.043,117.153
  region net NetE_1: 131.352,141.102 135.348,145.112 141.025,145.112 141.025,139.041 140.126,138.142 131.352,138.142
  region net NetA_1: 121.853,119.288 121.853,140.863 117.608,145.108 108.863,145.108 108.863,138.305 114.782,138.305 120.958,132.129 120.958,119.296
  region net +5: 124.031,117.159 124.031,141.421 118.022,147.43 135.723,147.43 128.834,140.541 128.834,119.299 128.289,119.299 127.059,118.069 124.793,118.069 124.793,117.903 124.043,117.153
  region net NetE2_1: 82.352,141.102 86.348,145.112 92.025,145.112 92.025,139.041 91.126,138.142 82.352,138.142
  region net +5: 75.031,117.159 75.031,141.421 69.022,147.43 86.723,147.43 79.834,140.541 79.834,119.299 79.289,119.299 78.059,118.069 75.793,118.069 75.793,117.903 75.043,117.153
  region net NetAND_13: 33.364,140.794 37.915,145.345 44.392,145.345 44.392,140.863 44.323,140.794
  region net NetH5_1: 30.557,8.813 34.876,4.494 43.778,4.494 43.778,8.802 43.767,8.813
  region net +5: 157.169,36.401 158.402,35.168 178.663,35.168 186.194,42.699 193.07,42.699 193.07,50.23 192.4,50.9 157.1,50.9 157.1,36.47
  region net NetC_1: 117.571,111.77 117.568,111.767 109.541,111.767 107.366,109.592 107.366,104.54 110.182,104.54 117.412,111.77
  region net NetC3_1: 68.571,39.77 68.568,39.767 60.541,39.767 58.366,37.592 58.366,32.54 61.182,32.54 68.412,39.77
  region net NetC2_1: 68.571,111.77 68.568,111.767 60.541,111.767 58.366,109.592 58.366,104.54 61.182,104.54 68.412,111.77
  region net NetAND_4: 19.571,111.77 19.568,111.767 11.541,111.767 9.366,109.592 9.366,104.54 12.182,104.54 19.412,111.77
  region net NetNOR_4: 21.045,39.771 12.805,39.771 6.778,37.368 7.684,31.802 13.076,31.802
  text "Kevin Petrus Tambunan" at 196.871,60.8 h3.5
  text "Trainer /  / Elektronika /  / Digital V 1.0" at 185,7.1 h5.5

## Silkscreen, mask and mechanical layers (free items; w line width, h text height)
Top Overlay:
  lines w0.254: 2.9,8.9 13.9,8.9 ; 2.9,20.9 13.9,20.9 ; 2.9,32.9 13.9,32.9 ; 2.9,44.9 13.9,44.9 ; 2.9,56.9 13.9,56.9 ; 2.9,68.9 13.9,68.9 ; 2.9,80.9 13.9,80.9 ; 2.9,92.9 13.9,92.9 ; 2.9,104.9 13.9,104.9 ; 2.9,116.9 13.9,116.9 ; 2.9,128.9 13.9,128.9 ; 2.9,140.9 13.9,140.9 ; 8.4,38.9 45.4,38.9 ; 8.4,110.9 45.4,110.9 ; 26.9,8.9 26.9,68.9 ; 26.9,80.9 26.9,140.9 ; 39.9,8.9 50.9,8.9 ; 39.9,20.9 50.9,20.9 ; 39.9,32.9 50.9,32.9 ; 39.9,44.9 50.9,44.9 ; 39.9,56.9 50.9,56.9 ; 39.9,68.9 50.9,68.9 ; 39.9,80.9 50.9,80.9 ; 39.9,92.9 50.9,92.9 ; 39.9,104.9 50.9,104.9 ; 39.9,116.9 50.9,116.9 ; 39.9,128.9 50.9,128.9 ; 39.9,140.9 50.9,140.9 ; 51.9,8.9 62.9,8.9 ; 51.9,20.9 62.9,20.9 ; 51.9,32.9 62.9,32.9 ; 51.9,44.9 62.9,44.9 ; 51.9,56.9 62.9,56.9 ; 51.9,68.9 62.9,68.9 ; 51.9,80.9 62.9,80.9 ; 51.9,92.9 62.9,92.9 ; 51.9,104.9 62.9,104.9 ; 51.9,116.9 62.9,116.9 ; 51.9,128.9 62.9,128.9 ; 51.9,140.9 62.9,140.9 ; 57.4,38.9 94.4,38.9 ; 57.4,110.9 94.4,110.9 ; 75.9,8.9 75.9,68.9 ; 75.9,80.9 75.9,140.9 ; 88.9,8.9 99.9,8.9 ; 88.9,20.9 99.9,20.9 ; 88.9,32.9 99.9,32.9 ; 88.9,44.9 99.9,44.9 ; 88.9,56.9 99.9,56.9 ; 88.9,68.9 99.9,68.9 ; 88.9,80.9 99.9,80.9 ; 88.9,92.9 99.9,92.9 ; 88.9,104.9 99.9,104.9 ; 88.9,116.9 99.9,116.9 ; 88.9,128.9 99.9,128.9 ; 88.9,140.9 99.9,140.9 ; 100.9,8.9 111.9,8.9 ; 100.9,20.9 111.9,20.9 ; 100.9,32.9 111.9,32.9 ; 100.9,44.9 111.9,44.9 ; 100.9,56.9 111.9,56.9 ; 100.9,68.9 111.9,68.9 ; 100.9,80.9 111.9,80.9 ; 100.9,92.9 111.9,92.9 ; 100.9,104.9 111.9,104.9 ; 100.9,116.9 111.9,116.9 ; 100.9,128.9 111.9,128.9 ; 100.9,140.9 111.9,140.9 ; 106.4,38.9 143.4,38.9 ; 106.4,110.9 143.4,110.9 ; 124.9,8.9 124.9,68.9 ; 124.9,80.9 124.9,140.9 ; 137.9,8.9 148.9,8.9 ; 137.9,20.9 148.9,20.9 ; 137.9,32.9 148.9,32.9 ; 137.9,44.9 148.9,44.9 ; 137.9,56.9 148.9,56.9 ; 137.9,68.9 148.9,68.9 ; 137.9,80.9 148.9,80.9 ; 137.9,92.9 148.9,92.9 ; 137.9,104.9 148.9,104.9 ; 137.9,116.9 148.9,116.9 ; 137.9,128.9 148.9,128.9 ; 137.9,140.9 148.9,140.9 ; 149.9,80.9 160.9,80.9 ; 149.9,92.9 160.9,92.9 ; 149.9,104.9 160.9,104.9 ; 149.9,116.9 160.9,116.9 ; 149.9,128.9 160.9,128.9 ; 149.9,140.9 160.9,140.9 ; 155.4,110.9 192.4,110.9 ; 173.9,80.9 173.9,140.9 ; 186.9,80.9 197.9,80.9 ; 186.9,92.9 197.9,92.9 ; 186.9,104.9 197.9,104.9 ; 186.9,116.9 197.9,116.9 ; 186.9,128.9 197.9,128.9 ; 186.9,140.9 197.9,140.9 ; 8.4,8.9 45.4,8.9 45.4,68.9 8.4,68.9 8.4,8.9 ; 8.4,80.9 45.4,80.9 45.4,140.9 8.4,140.9 8.4,80.9 ; 57.4,8.9 94.4,8.9 94.4,68.9 57.4,68.9 57.4,8.9 ; 57.4,80.9 94.4,80.9 94.4,140.9 57.4,140.9 57.4,80.9 ; 106.4,8.9 143.4,8.9 143.4,68.9 106.4,68.9 106.4,8.9 ; 106.4,80.9 143.4,80.9 143.4,140.9 106.4,140.9 106.4,80.9 ; 155.4,80.9 192.4,80.9 192.4,140.9 155.4,140.9 155.4,80.9

## Dimensions
0,150 to 200,150 on Top Overlay
0,0 to 0,150 on Top Overlay